# Altium PCB PoC.PcbDoc
Units mil, origin at the board's own origin, x right, y up, seen from the top; angles counter-clockwise.
Board outline 2125 x 3130 mil, 2 copper layers (Top Layer, Bottom Layer); 49 components, 65 nets, 196 pads, 61 vias.
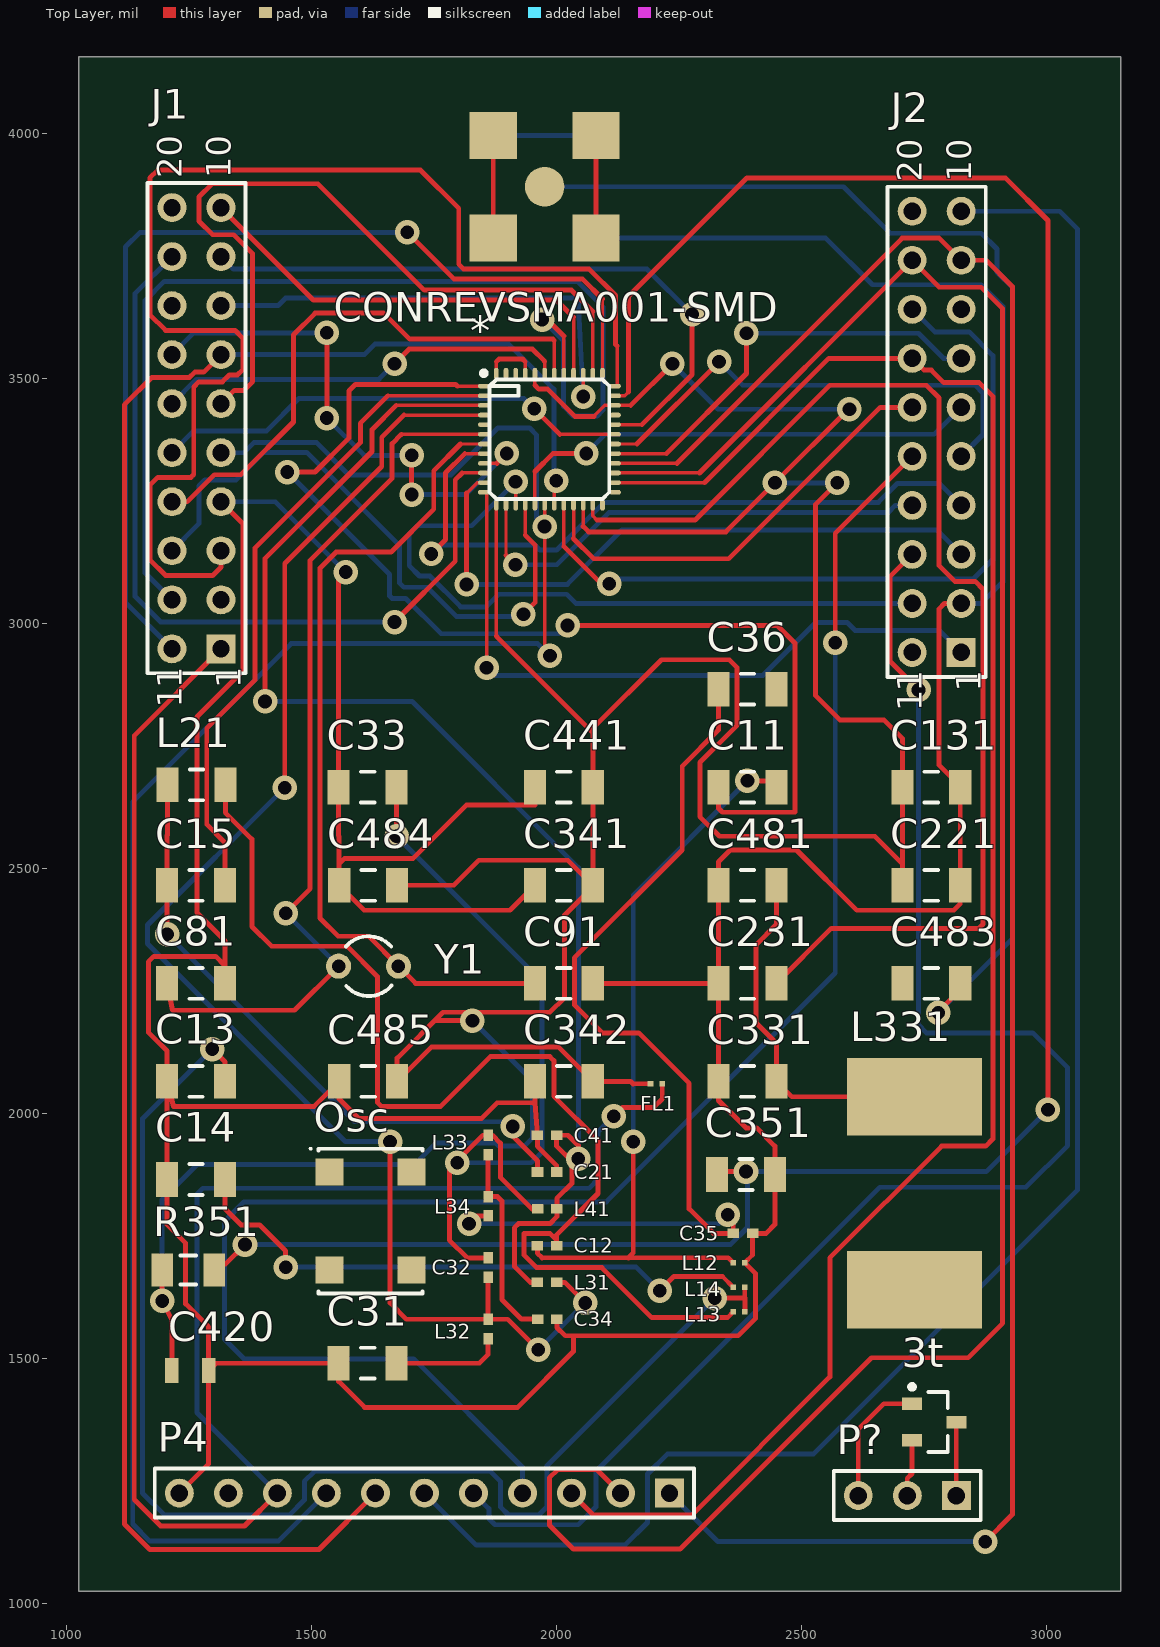
[diagram p0: Top Layer view]
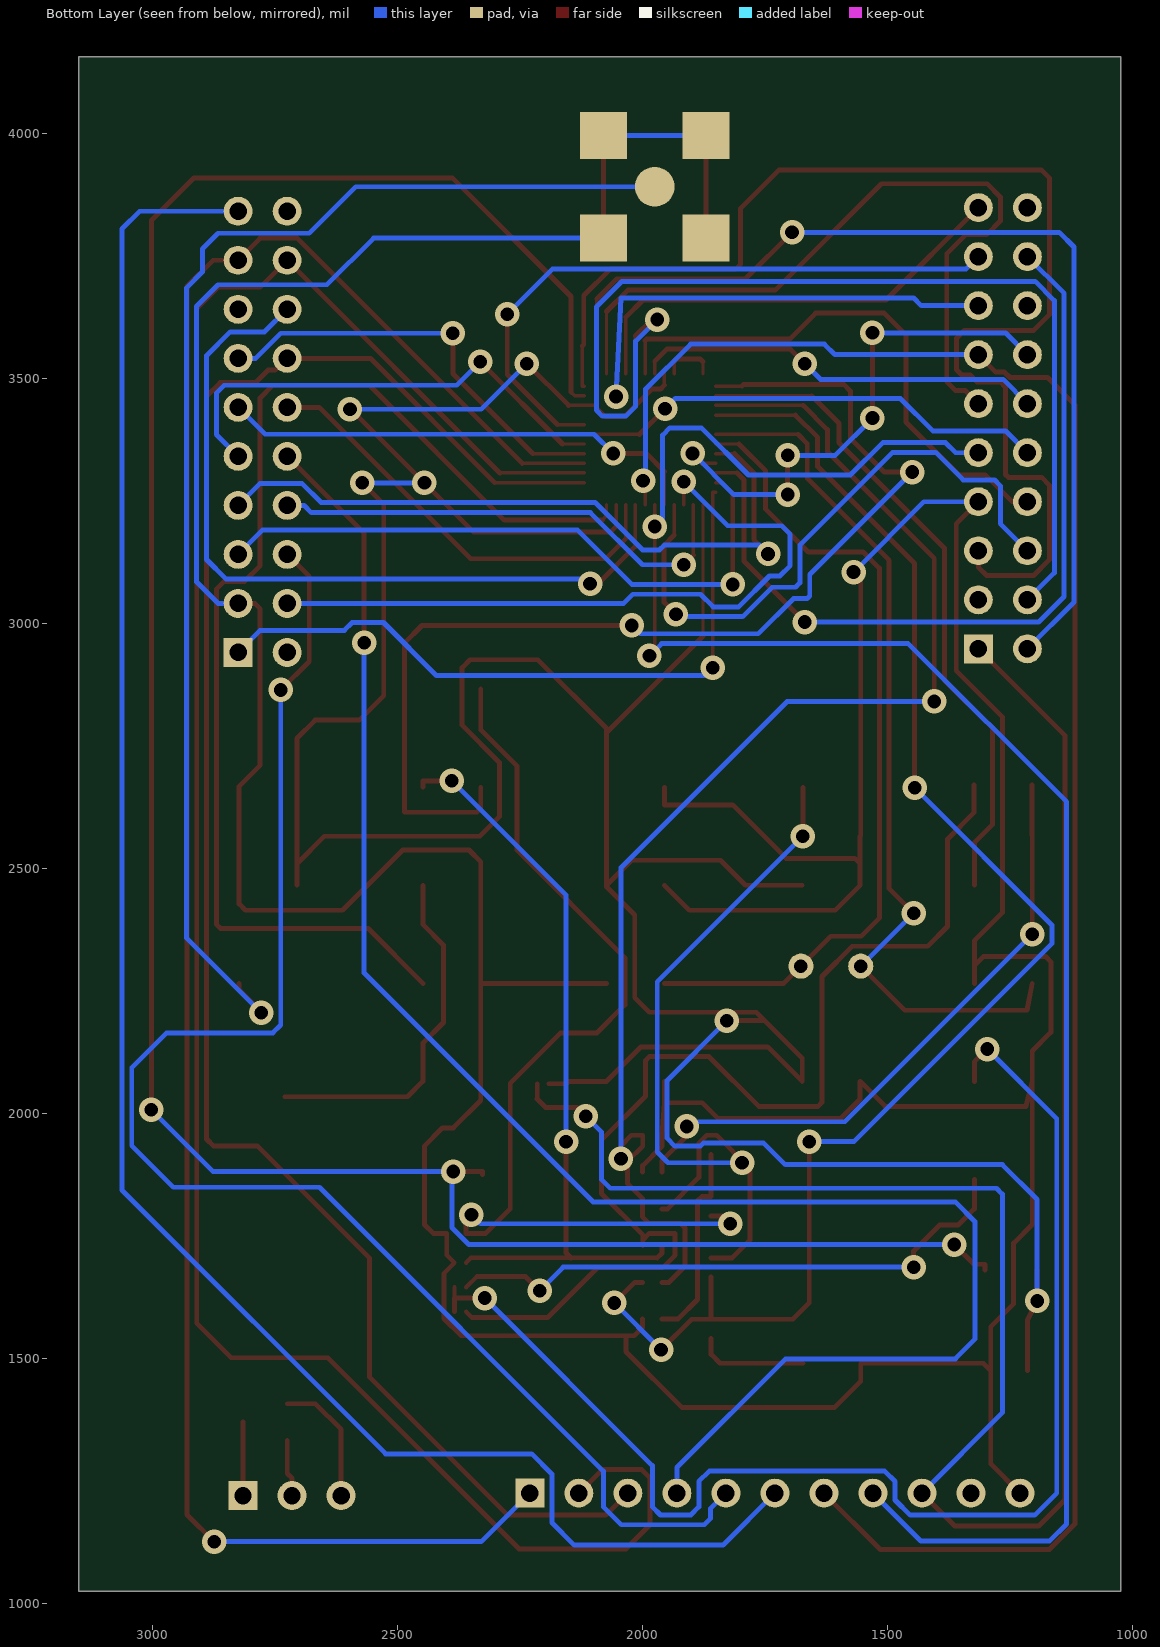
[diagram p1: Bottom Layer view, seen from below]

## Layer stack, top to bottom
Top Solder: solder mask 0.4, Solder Resist, Dk 3.5
Top Layer: signal copper 1.4
Dielectric 1: dielectric 12.6, FR-4, Dk 4.8
Bottom Layer: signal copper 1.4
Bottom Solder: solder mask 0.4, Solder Resist, Dk 3.5

## Board outline
1025,1026 1025,4156 3150,4156 3150,1026

## Design rules (kind name [scope] priority, off if disabled: settings)
Clearance [All] p1: gap=10 ignorepadtopadclearanceinfootprint=FALSE except(0: Arc-Hole Track-Hole SMDPad-Hole THPad-Hole Via-Hole Fill-Hole Poly-Hole Region-Hole Text-Hole)
PolygonConnect [All] p1: connectstyle=Relief reliefconductorwidth=10 reliefentries=4 polygonreliefangle="90 Angle" airgapwidth=10
RoutingVias [All] p1: holewidth=28 width=50 viastyle="Through Hole" minholewidth=28 minwidth=50 maxholewidth=28 maxwidth=50
SMDNeckDown [All] p1: percent=75.000
SolderMaskExpansion [All] p1: expansion=4
Width [All] p1: maxlimit=10 minlimit=5 preferedwidth=10 bottomlayer_minwidth=10 minimp=50.000000 maximp=50.000000 favimp=50.000000
30 further rules are at their usual default settings.

## Classes and differential pairs
component class Sheet2: J1 J2 P4

## Components (designator, comment, footprint, x,y, rotation, side; value= is the part's Value field where it differs from the comment)
3t "Temp" SOT95P237X112-3N 2770,1371 r0 top
* "CC1352R1F3RGZ_1" CC1352R 1985,3376 r0 top
C11 "Cap" CAPC3216X06N 2389.06,2666 r0 top value=12pF
C12 "Cap" 0402 1980,1731 r0 top value=1.1pF
C13 "Cap" CAPC3216X06N 1264.06,2066 r0 top value=1pF
C14 "Cap" CAPC3216X06N 1264.06,1866 r0 top value=1pF
C15 "Cap" CAPC3216X06N 1264.05,2466 r180 top value=12pF
C21 "Cap" 0402 1980.32,1881 r180 top value=1.1pF
C31 "Cap" CAPC3216X06N 1614.05,1491 r180 top value=100pF
C32 "Cap" 0402 1860,1686.31 r90 top value=3.6pF
C33 "Cap" CAPC3216X06N 1614.06,2666 r0 top value=2.7pF
C34 "Cap" 0402 1980.63,1581 r180 top value=6.2pF
C35 "Cap" 0402 2379.69,1756 r180 top value=3pF
C36 "Cap" CAPC3216X06N 2389.06,2866 r0 top value=100pF
C41 "Cap" 0402 1980,1956 r0 top value=3.6pF
C81 "Cap" CAPC3216X06N 1264.06,2266 r0 top value=12pF
C91 "Cap" CAPC3216X06N 2014.53,2266 r0 top value=12pF
C131 "Cap" CAPC3216X06N 2764.06,2666 r0 top value=0.1uF
C221 "Cap" CAPC3216X06N 2764.06,2466 r0 top value=0.1uF
C231 "Cap" CAPC3216X06N 2389.06,2266 r180 top value=1uF
C331 "Cap" CAPC3216X06N 2389.06,2066 r180 top value=22uF
C341 "Cap" CAPC3216X06N 2014.53,2466 r180 top value=22uF
C342 "Cap" CAPC3216X06N 2014.53,2066 r180 top value=0.1uF
C351 "Cap" CAPC3216X06N 2385.94,1876 r0 top value=0.1uF
C420 "Cap" 0805 1252.4,1476 r0 top value=0.01uF
C441 "Cap" CAPC3216X06N 2014.53,2666 r180 top value=0.1uF
C481 "Cap" CAPC3216X06N 2389.06,2466 r180 top value=0.1uF
C483 "Cap" CAPC3216X06N 2764.06,2266 r0 top value=12pF
C484 "Cap" CAPC3216X06N 1615.2,2466 r180 top value=12pF
C485 "Cap" CAPC3216X06N 1615.2,2066 r180 top value=12pF
CONREVSMA001-SMD "" SMA_Jack 1975.16,3891 r90 top
FL1 "BLM" 0201 2203.19,2061 r180 top value=2.4nH
J1 "SSQ-110-23-L-D" HDR2X10_CEN 1315,2948.4 r90 top
J2 "SSQ-110-23-L-D" HDR2X10_CEN 2825,2941 r90 top
L12 "Inductor" 0201 2371.81,1696 r0 top value=2.4nH
L13 "Inductor" 0201 2371.81,1596 r0 top value=1.5nH
L14 "Inductor" 0201 2371.81,1646 r180 top value=2nH
L21 "Inductor" CAPC3216X06N 1265,2671 r0 top value=2.4nH
L31 "Inductor" 0402 1980,1656 r180 top value=27nH
L32 "Inductor" 0402 1860,1561 r270 top value=7.5nH
L33 "Inductor" 0402 1860,1936.32 r270 top value=6.8nH
L34 "Inductor" 0402 1860,1811.32 r270 top value=6.8nH
L41 "Inductor" 0402 1980.63,1806 r180 top value=7.5nH
L331 "Inductor" "Non-Standard Inductor" 2730,1837.85 r90 top value=6.8mH
Osc "Osc" OSC 1620,1781 r0 top
P4 "BB02-HJ221-KB1-603000" HDR1X11 2230,1226 r180 top
P? "Header 3" HDR1X3 2815,1221 r180 top
R351 "Res3" C1206 1248.15,1681 r180 top value=100K
Y1 "32.768kHz" R38 1616.02,2301 r90 top

## Footprints (in the part's own frame and the unit in brackets; to place one, negate y for a bottom-side part, rotate by r counter-clockwise, add the part's x,y. Pads: shape width x height; smd on the part's side, far side on the other; paste and mask are expansions set on the pad)
0201 [mm]
  rect 0.3x0.3 smd: 1(-0.3,0) 2(0.3,0)
0402 [mm] "Chip Capacitor, Body 1.0x0.5mm, IPC High Density"
  rect 0.6x0.5 smd: 1(-0.5,0) 2(0.5,0)
  body extent -0.55,-0.3 0.55,0.3, height 1.3
0805 [mm]
  rect 0.7x1.3 smd: 1(-0.95,0) 2(0.95,0)
C1206 [mm] "Chip Capacitor, Body 3.2x1.6mm, IPC High Density"
  rect 1.1x1.7 smd: 1(-1.35,0) 2(1.35,0)
  silkscreen extent -0.4,-0.75 0.4,0.75, body extent -1.7,-0.9 1.7,0.9, height 1.3
CAPC3216X06N [mm] "Chip Capacitor, 2-Leads, Body 3,20x1,60mm, IPC Medium Density"
  rect 1.15x1.8 smd: 1(-1.5,0) 2(1.5,0)
  silkscreen extent -0.35,-0.8 0.35,0.8, body extent -1.7,-0.9 1.7,0.9, height 0.6
CC1352R [mm] "CQFP, 48-Leads, Body 7,40x7,40mm, Pitch 0,50mm, IPC Medium Density"
  oval 0.6x0.24 smd: 1(-3.4,2.75) 2(-3.4,2.25) 3(-3.4,1.75) 4(-3.4,1.25) 5(-3.4,0.75) 6(-3.4,0.25) 7(-3.4,-0.25) 8(-3.4,-0.75) 9(-3.4,-1.25) 10(-3.4,-1.75) 11(-3.4,-2.25) 12(-3.4,-2.75) 25(3.4,-2.75) 26(3.4,-2.25) 27(3.4,-1.75) 28(3.4,-1.25) 29(3.4,-0.75) 30(3.4,-0.25) 31(3.4,0.25) 32(3.4,0.75) 33(3.4,1.25) 34(3.4,1.75) 35(3.4,2.25) 36(3.4,2.75)
  oval 0.24x0.6 smd: 13(-2.75,-3.4) 14(-2.25,-3.4) 15(-1.75,-3.4) 16(-1.25,-3.4) 17(-0.75,-3.4) 18(-0.25,-3.4) 19(0.25,-3.4) 20(0.75,-3.4) 21(1.25,-3.4) 22(1.75,-3.4) 23(2.25,-3.4) 24(2.75,-3.4) 37(2.75,3.4) 38(2.25,3.4) 39(1.75,3.4) 40(1.25,3.4) 41(0.75,3.4) 42(0.25,3.4) 43(-0.25,3.4) 44(-0.75,3.4) 45(-1.25,3.4) 46(-1.75,3.4) 47(-2.25,3.4) 48(-2.75,3.4)
  silkscreen extent -3.52,-3.1 3.1,3.54, body extent -3.5,-3.5 6.98,3.5, height 1
HDR1X3 [mm] "Connector; Header; 3 Position"
  rect 1.5x1.5 hole 0.9: 1(0,0)
  round 1.5 hole 0.9: 2(2.54,0) 3(5.08,0)
  silkscreen extent -1.27,-1.27 6.35,1.27
HDR1X11 [mm] "Connector; Header; 11 Position"
  rect 1.5x1.5 hole 0.9: 1(0,0)
  round 1.5 hole 0.9: 2(2.54,0) 3(5.08,0) 4(7.62,0) 5(10.16,0) 6(12.7,0) 7(15.24,0) 8(17.78,0) 9(20.32,0) 10(22.86,0) 11(25.4,0)
  silkscreen extent -1.27,-1.27 26.67,1.27
HDR2X10_CEN [mm] "Connector; Header; 10x2 Position"
  rect 1.5x1.5 hole 0.9: 1(0,0)
  round 1.5 hole 0.9: 2(2.54,0) 3(5.08,0) 4(7.62,0) 5(10.16,0) 6(12.7,0) 7(15.24,0) 8(17.78,0) 9(20.32,0) 10(22.86,0) 11(0,2.54) 12(2.54,2.54) 13(5.08,2.54) 14(7.62,2.54) 15(10.16,2.54) 16(12.7,2.54) 17(15.24,2.54) 18(17.78,2.54) 19(20.32,2.54) 20(22.86,2.54)
  silkscreen extent -1.27,-1.27 24.13,3.81
"Non-Standard Inductor" [mm]
  rect 4x7 smd: 1(-5,0) 2(5,0)
OSC [mm] "SON, 4-Leads, Body 7,00x5,08mm, Pitch 5,08mm, IPC Medium Density"
  rect 1.45x1.4 smd: 1(-2.13,2.54) 2(-2.13,-2.54) 3(2.13,-2.54) 4(2.13,2.54)
  silkscreen extent -3.15,-3.75 2.7,3.8, body extent -2.55,-3.6 2.55,3.6, height 1.8
R38 [mm] "Crystal, Thru-Hole; 2 Leads; Body 3.1 x 8.2 mm (Dia.xH)"
  round 1.3 hole 0.7: 1(0,1.55) 2(0,-1.55)
  silkscreen extent -1.55,-1.19 1.55,1.17
SMA_Jack [mm]
  round 2.05 all layers, no hole: 1(0,0)
  rect 2.44x2.44 all layers, no hole: 2(-2.66,2.66) 3(-2.66,-2.66) 4(2.66,2.66) 5(2.66,-2.66)
SOT95P237X112-3N [mm] "SOT23, 3-Leads, Body 2,86x2,37mm, Pitch 0,95mm, IPC Medium Density"
  rect 1.05x0.65 smd: 1(-1.15,0.95) 2(-1.15,-0.95) 3(1.15,0)
  silkscreen extent -1.27,-1.55 0.7,1.95, body extent -0.7,-1.52 0.7,1.53, height 1.12

## Part data
C11 C12 C13 C14 C15 C21 C31 C32 C33 C34 C35 C36 C41 C81 C91 C131 C221 C231 C331 C341 C342 C351 C420 C441 C481 C483 C484 C485: "Capacitor", LatestRevisionDate=17-Jul-2002, LatestRevisionNote="Re-released for DXP Platform.", PackageDescription="Radial Cap, Thru-Hole; 2 Leads; 0.3 in Pin Spacing", PackageReference=RAD-0.3, Published=8-Jun-2000, Publisher="Altium Limited"
CONREVSMA001-SMD: library part COAX-M, "RF Coaxial PCB Connector, MMCX; Thru-Hole, Vertical Mount Plug,  50 Ohm Impedance", PackageDocument="Rev. A, 16-Jun-1997", ComponentLink1Description="Manufacturer Link", ComponentLink1URL=http://www.amphenolrf.com/, DatasheetDocument=30-May-2003, DrillSize="Corresponds to nominal value.", LatestRevisionDate=15-Jul-2004, LatestRevisionNote="Component Replaced.", PackageReference=908-21103, PCB_Layout="Complies with manufacturer's recommendation.", Published=15-Jul-2004, Publisher="Altium Limited"
FL1: library part Inductor, "Inductor", Code_IEC=1005, Code_JEITA=0402, LatestRevisionDate=29-May-2009, LatestRevisionNote="IPC-7351 Footprint Added.", PackageDescription="Chip Inductor", PackageReference=0402-A, Published=8-Jun-2000, Publisher="Altium Limited"
P4: library part "Header 11", "Header, 11-Pin", LatestRevisionDate=17-Jul-2002, LatestRevisionNote="Re-released for DXP Platform.", Publisher="Altium Limited"
P?: "Header, 3-Pin", LatestRevisionDate=17-Jul-2002, LatestRevisionNote="Re-released for DXP Platform.", Publisher="Altium Limited"
R351: "Resistor", LatestRevisionDate=29-May-2009, LatestRevisionNote="IPC-7351 Footprint Added.", PackageDescription="Chip Resistor", PackageReference=J1-0603, Published=8-Jun-2000, Publisher="Altium Limited"
Y1: library part XTAL, "Crystal Oscillator", LatestRevisionDate=17-Jul-2002, LatestRevisionNote="Re-released for DXP Platform.", PackageDescription="Crystal, Thru-Hole; 2 Leads; Body 3.1 x 8.2 mm (Dia.xH)", PackageReference=R38, Published=8-Jun-2000, Publisher="Altium Limited"
L12 L13 L14 L21 L31 L32 L33 L34 L41 L331: Code_IEC=1005, Code_JEITA=0402, LatestRevisionDate=29-May-2009, LatestRevisionNote="IPC-7351 Footprint Added.", PackageDescription="Chip Inductor", PackageReference=0402-A, Published=8-Jun-2000, Publisher="Altium Limited"

## Via types
v1: diameter 50, hole 28, Top Layer to Bottom Layer, 61 vias

## Nets (pads, with @x,y where several pads share a name; then routed paths per layer and width w, separated by ;. In a path a pad name is that pad's centre, name@x,y a point inside that pad or via, vN(x,y) a via of type N, cw(c..) or ccw(c..) an arc to the next point about the centre after c; other vN are vias at no path point)
BP_RESET: J2.11
DIO3: *.8 J2.4 | length 1439.1
  Top Layer w7.09: 1812.27,3346.47 *.8
  Top Layer w10: v1(1744,3142) 1772.97,3170.97 1772.97,3307.17 1812.27,3346.47
  Bottom Layer w10: v1(1744,3142) 1761.84,3159.84 1955.79,3159.84 1965.63,3150 2000,3150 2097,3247 2656,3247 2695,3286 2780,3286 J2.4
DIO4_SCL: *.9 J1.17 | length 1077
  Top Layer w7.09: *.9 1877.79,3326.79
  Top Layer w10: v1(1531,3419) v1(1531,3593) ; v1(1704,3263) v1(1704,3343) ; 1877.79,3326.79 v1(1898,3347)
  Bottom Layer w10: J1.17 1259.6,3593 v1(1531,3593) ; v1(1531,3419) 1607,3343 v1(1704,3343) ; v1(1704,3263) 1814,3263 v1(1898,3347)
DIO5_SDA: *.10 J1.19 | length 1680.4
  Top Layer w7.09: 1807,3307.1 *.10
  Top Layer w10: v1(1669,3003) 1792.97,3126.97 1792.97,3293.07 1807,3307.1
  Bottom Layer w10: J1.19 1140,3673.4 1140,3055 1192,3003 v1(1669,3003)
DIO6_RLED: *.11 J2.3 | length 1306.1
  Top Layer w7.09: 1816,3266 1837.42,3287.42 *.11
  Top Layer w10: v1(1816,3079.7) 1816,3266
  Bottom Layer w10: v1(1816,3079.7) 2021.7,3079.7 2133,3191 2775,3191 J2.3
DIO7_GLED: *.12 J2.1 | length 1408.2
  Top Layer w7.09: *.12 1856.77,3267.73 v1(1856.77,2910)
  Bottom Layer w10: v1(1856.77,2910) 1872.77,2894 2420.48,2894 2528.43,3001.95 2592.48,3001.95 2608.43,2986 2780,2986 J2.1
DIO8_MISO: *.14 J2.14 | length 989.7
  Top Layer w7.09: 1896.42,3139.21 *.14
  Top Layer w10: 1896.42,3139.21 v1(1915.79,3119.84)
  Bottom Layer w10: v1(1915.79,3119.84) 2000.08,3119.84 2106.33,3226.09 2675.79,3226.09 2690.69,3241 J2.14
DIO9_MOSI: *.15 J2.12 | length 1451.5
  Top Layer w7.09: *.15 v1@1916.1,3288.9
  Top Layer w10: v1(1916,3289) v1@1916.1,3288.9
  Bottom Layer w10: v1(1916,3289) 1826.4,3199.4 1716.4,3199.4 1699,3182 1699,3117.83 1720,3096.83 1741.17,3096.83 1804,3034 1856,3034 1881.7,3059.7 2020,3059.7 2038.7,3041 J2.12
DIO10_SCLK: *.16 J1.13 | length 1273
  Top Layer w7.09: 1935.79,3180.21 *.16
  Top Layer w10: v1(1932,3019) 1956,3043 1956,3160 1935.79,3180.21
  Bottom Layer w10: J1.13 1270,3203.4 1270,3281 1282,3293 1345.94,3293 1401.94,3349 1490,3349 1679,3160 1679,3082.92 1688,3073.92 1735.79,3073.92 1795.71,3014 1927,3014 v1(1932,3019)
DIO11_CS: *.17 J2.6 | length 991.6
  Top Layer w7.09: *.17 1955.47,3310
  Top Layer w10: 1955.47,3310 1992.47,3347 v1(2060,3347)
  Bottom Layer w10: v1(2060,3347) 2099,3386 2770,3386 J2.6
DIO12_RXD: *.18 J1.5 P4.8 | length 4149.9
  Top Layer w7.09: v1@1975.16,2944.84 v1(1975.16,3197.68) *.18
  Top Layer w10: v1@1975.16,2944.84 v1(1986,2934)
  Bottom Layer w10: J1.5 1361.34,3348.4 1381.94,3369 1510,3369 1576,3303 1784,3303 1880,3399 1944.28,3399 1959,3384.28 1959,3213.84 v1(1975.16,3197.68) ; P4.8 1432,1128 1170,1128 1135,1163 1135,2636 1458,2959 1961,2959 v1(1986,2934)
DIO13_TXD: *.19 J1.7 P4.7 | length 4069.3
  Top Layer w7.09: *.19 v1@1994.84,3287
  Top Layer w10: J1.7 1279.53,3512.93 1261.6,3512.93 1250.47,3501.8 1173.8,3501.8 1118,3446 1118,1163 1170,1111 1515,1111 P4.7 ; v1@1994.84,3287 v1(1999,3291.16)
  Bottom Layer w10: J1.7 1607.4,3548.4 1629,3570 1902,3570 1994,3478 1994,3296.16 v1(1999,3291.16)
DIO14_BTN2: *.20 J2.18 | length 1631.5
  Top Layer w7.09: 2014.54,3157.46 2014.54,3234.53 *.20
  Top Layer w10: 2014.54,3157.46 2091,3081 v1(2107,3081)
  Bottom Layer w10: v1(2107,3081) 2117,3091 2850,3091 2889.53,3130.53 2889.53,3546.47 2841.16,3594.84 2771.16,3594.84 J2.18
DIO15_BTN1: *.21 J2.16 | length 904.9
  Top Layer w7.09: 2034.21,3173 *.21
  Top Layer w10: 2034.21,3173 2075.21,3132 2350.84,3132 2659.84,3441 J2.16
DIO16_TDO: *.26 J2.17 P4.3 | length 3761.2
  Top Layer w7.09: *.26 2301.44,3287.42
  Top Layer w10: P4.3 2075,1181 2275,1181 2557.2,1463.2 2557.2,1706.2 2785,1934 2875,1934 2889.53,1948.53 2889.53,3463.47 2861.75,3491.25 2789.53,3491.25 2764.04,3516.74 2749.26,3516.74 J2.17 2555.02,3541 2301.44,3287.42
DIO17_TDI: *.27 J2.19 P4.2 | length 4484.7
  Top Layer w7.09: *.27 2291.1,3307.1
  Top Layer w10: P4.2 2082,1274 2002,1274 1985,1257 1985,1161 2034,1112 2251.74,1112 2642,1502.26 2839.26,1502.26 2909.53,1572.53 2909.53,3642.47 2866,3686 2780,3686 J2.19 2291.1,3307.1
DIO18_RTS/SWO: *.28 J2.9 P4.1 | length 4310.2
  Top Layer w7.09: *.28 2245.35,3326.79
  Top Layer w10: 2245.35,3326.79 2704.56,3786 2780,3786 J2.9 2876,3741 2929.53,3687.47 2929.53,1182.53 v1(2874,1127)
  Bottom Layer w10: P4.1 2329,1127 v1(2874,1127)
DIO19_CTS: *.29 J2.7 | length 877
  Top Layer w7.09: *.29 2223.48,3346.47
  Top Layer w10: 2223.48,3346.47 2387,3509.99 v1(2387,3592)
  Bottom Layer w10: v1(2387,3592) 2738,3592 2789,3541 J2.7
DIO20_Flash_CS: *.30 J2.5 | length 994.1
  Top Layer w7.09: *.30 2163.27,3366.16
  Top Layer w10: 2163.27,3366.16 v1(2331.11,3534)
  Bottom Layer w10: v1(2331.11,3534) 2379.11,3486 2853.53,3486 2869.53,3470 2869.53,3385.53 J2.5
DIO21: *.31 J1.15 | length 980
  Top Layer w7.09: 2006.16,3385.84 *.31
  Top Layer w10: v1(1954,3438) 2006.16,3385.84
  Bottom Layer w10: J1.15 1259.6,3393 1408,3393 1474,3459 1933,3459 v1(1954,3438)
DIO22: *.32 J1.9 | length 1332.2
  Top Layer w7.09: *.32 2173.53,3405.53
  Top Layer w10: 2173.53,3405.53 2276,3508 v1(2276,3631)
  Bottom Layer w10: J1.9 1340.4,3723 2184,3723 v1(2276,3631)
DIO23_Analog: *.36 J1.3 | length 2614.5
  Top Layer w7.09: *.36 2123,3484.27 2123,3566
  Top Layer w10: J1.3 1315,3115 1298,3098 1202,3098 1170,3130 1170,3282 1186,3298 1253.53,3298 1259.53,3304 1259.53,3482.46 1270,3492.93 1317.93,3492.93 1332,3507 1348.53,3507 1359.53,3518 1359.53,3582 1343.53,3598 1202,3598 1170,3630 1170,3909 1186,3925 1722,3925 1800,3847 1800,3733 1810,3723 2066,3723 2120,3669 2120,3569 2123,3566
DIO24_Analog: *.37 J1.11 | length 2053.1
  Top Layer w7.09: *.37 2093.27,3662
  Top Layer w10: v1(1695,3798) 1790,3703 2052.27,3703 2093.27,3662
  Bottom Layer w10: J1.11 1120,3043.4 1120,3768 1150,3798 v1(1695,3798)
DIO25_Analog: *.38 J1.6 | length 1579.7
  Top Layer w7.09: *.38 2073.58,3636.42
  Top Layer w10: J1.6 1342.3,3475.7 1362,3475.7 1379.53,3493.23 1379.53,3754.47 1341,3793 1298,3793 1270,3821 1270,3870 1297,3897 1512.69,3897 1729.69,3680 2030,3680 2073.58,3636.42
DIO26_Analog: *.39 J1.8 | length 983.2
  Top Layer w7.09: v1@2053.9,3464.97 *.39
  Top Layer w10: v1@2053.9,3464.97 v1(2054,3463)
  Bottom Layer w10: J1.8 1431.4,3648.4 1447,3664 2043.61,3664 v1(2054,3463)
DIO27_Analog: *.40 J1.10 | length 926.9
  Top Layer w7.09: *.40 2034.21,3625
  Top Layer w10: J1.10 1503.4,3660 1999.21,3660 2034.21,3625
DIO28_Analog: *.41 J1.12 | length 2239.4
  Top Layer w7.09: *.41 2014.53,3586.47
  Top Layer w10: v1(1970,3620) 1981,3620 2014.53,3586.47
  Bottom Layer w10: J1.12 1160,3103.4 1160,3658.68 1199.32,3698 2042,3698 2094,3646 2094,3435 2082,3423 2034,3423 2014,3443 2014,3576 v1(1970,3620)
DIO29_Analog: *.42 J1.14 | length 1133.9
  Top Layer w7.09: *.42 1994.84,3577.16
  Top Layer w10: J1.14 1246.24,3248.4 1301.24,3303.4 1355.45,3303.4 1463,3410.95 1463,3589 1507,3633 1647,3633 1700,3580 1992,3580 1994.84,3577.16
DIO30_Analog: *.43 J1.16 | length 841.5
  Top Layer w7.09: *.43 1975.16,3534.84
  Top Layer w10: v1(1669,3530) 1698.61,3559.61 1950.39,3559.61 1975.16,3534.84
  Bottom Layer w10: J1.16 1264.6,3498 1637,3498 v1(1669,3530)
GND: C13.1 C14.1 C21.1 C31.2 C33.1 C34.1 C35.1 C41.1 C81.2 C91.2 C131.2 C221.2 C231.2 C331.2 C341.2 C342.2 C351.2 C420.2 C441.2 C481.2 C484.2 C485.2 CONREVSMA001-SMD.2 CONREVSMA001-SMD.3 CONREVSMA001-SMD.4 CONREVSMA001-SMD.5 J1.4 J2.2 L12.2 P4.11 | length 11397.4
  Top Layer w8.86: 2399.37,1711.75 L12.2 2405,1674.62
  Top Layer w10: P4.11 1289.8,1285.8 C420.2 ; J1.4 1360,3203.4 1360,2903.87 1266,2809.87 1266,2410 1323.11,2352.89 1323.11,2302 ; C81.2 1323.11,2302 ; v1(1569.5,3104.9) 1555,3090.4 C33.1 1555,2567.14 1556.14,2566 1556.14,2510 ; CONREVSMA001-SMD.2 CONREVSMA001-SMD.4 ; C342.2 1955.47,2022.29 ; C341.2 1904.47,2415 1607.14,2415 C484.2 1556.14,2510 ; C441.2 1955.47,2630 1816,2630 1707,2521 1567.14,2521 1556.14,2510 ; C21.1 2000,1894 1960.32,1933.68 C41.1 1955.47,2022.29 ; C34.1 2000.32,1564 2017.32,1547 2034,1547 ; C91.2 C231.2 ; CONREVSMA001-SMD.3 CONREVSMA001-SMD.5 ; 2399.37,1711.75 C35.1 2427,1756 2445,1774 C351.2 2445,1934 2408,1971 2386,1971 2330,2027 C331.2 C231.2 ; 2405,1674.62 2405,1582 2370,1547 2034,1547 ; J2.2 2791,3041 2780,3030 2780,2710.89 2823.11,2667.78 C131.2 C221.2 2823.11,2428.11 2810,2415 2612,2415 2489,2538 2354,2538 2330,2514 C481.2 C231.2 ; C13.1 1218,2015 1505.14,2015 C485.2 1556.14,2030 1595.58,1990.56 1846.56,1990.56 1878.29,2022.29 1955.47,2022.29 ; C13.1 1205,2128 1167,2166 1167,2310 1178,2321 1304.11,2321 1323.11,2302 ; C13.1 C14.1 1205,1774 1243,1736 1243,1612 1289.8,1565.2 C420.2 ; C420.2 1304.8,1491 C31.2 1555,1454 1608,1401 1920,1401 2034,1515 2034,1547
  Bottom Layer w10: J1.4 1426,3248.4 v1(1569.5,3104.9) ; CONREVSMA001-SMD.4 CONREVSMA001-SMD.5 ; CONREVSMA001-SMD.3 2548.72,3786.28 2644,3691 2866,3691 2910,3647 2910,3085 2866,3041 J2.2
LP_RESET: J2.10 P4.6 | length 3946.7
  Bottom Layer w10: P4.6 1836,1120 2139,1120 2185,1166 2185,1265 2226,1306 2524,1306 3062,1844 3062,3805 3026,3841 J2.10
Net3t_1T: P?.1
Net3t_2T: P?.2
Net3t_3T: P?.3
Net*_1: *.1 C11.1 | length 2300.6
  Top Layer w7.09: 1797.38,3484.27 *.1
  Top Layer w10: v1(1450,3309) 1506.86,3309 1576,3378.14 1576,3474.27 1589.45,3487.72 1793.93,3487.72 1797.38,3484.27 ; v1(2022,2996) 2450,2996 2486,2960 2486,2615 2338,2615 2330,2623 C11.1
  Bottom Layer w10: v1(1450,3309) 1659,3100 1659,3056.09 1664,3051.09 1691.91,3051.09 1764,2979 2005,2979 v1(2022,2996)
Net*_2: *.2 C15.1 | length 1362.7
  Top Layer w7.09: 1655.37,3464.58 *.2
  Top Layer w10: C15.1 1323.11,2553 1286,2590.11 1286,2786.23 1384,2884.23 1384,3153.7 1599.33,3369.03 1599.33,3408.54 1655.37,3464.58
Net*_3: *.3 C41.2 L31.2 L41.1 | length 2773.8
  Top Layer w7.09: 1672.46,3444.9 *.3
  Top Layer w10: v1(1405,2841) 1405,3132.9 1623,3350.9 1623,3395.44 1672.46,3444.9 ; L31.2 1946,1656 1913.5,1688.5 1913.5,1767.35 1922,1775.84 1986.16,1775.84 2000.32,1790 L41.1 2000.32,1827.32 2031,1858 2031,1902.69 1999.69,1934 C41.2 2023,1956 2044,1935 v1(2044,1908)
  Bottom Layer w10: v1(1405,2841) 1705,2841 2044,2502 v1(2044,1908)
Net*_4: *.4 C32.1 L31.1 L32.1 | length 3088.1
  Top Layer w7.09: 1688.21,3425.21 *.4
  Top Layer w10: v1(1445,2665) 1445,3122.3 1643,3320.3 1643,3380 1688.21,3425.21 ; v1(1660,1943) 1660,1614 1693.32,1580.68 L32.1 ; C32.1 L32.1 ; v1(1962.34,1518.34) 1900,1580.68 L32.1 ; L31.1 2016,1656 v1(2058,1614)
  Bottom Layer w10: v1(1445,2665) 1165,2385 1165,2347 1569,1943 v1(1660,1943) ; v1(1962.34,1518.34) v1(2058,1614)
Net*_6: *.6 C81.1 Y1.1 | length 1827.8
  Top Layer w7.09: 1683,3385.84 *.6
  Top Layer w10: C81.1 1216,2211 1465,2211 Y1.1 ; v1(1447,2409) 1497,2459 1497,3129 1664,3296 1664,3366.84 1683,3385.84
  Bottom Layer w10: v1(1447,2409) Y1.1
Net*_7: *.7 C91.1 Y1.2 | length 1692.5
  Top Layer w7.09: 1803.67,3366.16 *.7
  Top Layer w10: 1803.67,3366.16 1749,3311.49 1749,3233 1661.96,3145.96 1550,3145.96 1517,3112.96 1517,2399 1554,2362 1616.05,2362 Y1.2 1712.05,2266 C91.1
Net*_13: *.13 *.22 *.34 *.44 C131.1 C221.1 C341.1 C342.1 C420.1 C441.1 C484.1 C485.1 FL1.2 R351.2 | length 7992.5
  Top Layer w7.09: 1876.73,2974.27 *.13 ; 1955.47,3486 *.44 ; 2053.9,3198 *.22 ; 2075.65,3422.54 2098,3444.9 *.34 2150.9,3444.9
  Top Layer w8.86: 2155.47,2061 FL1.2
  Top Layer w10: R351.2 v1(1195,1618) 1215,1579 C420.1 ; C484.1 1790,2466 1841,2517 2022.58,2517 C341.1 ; v1(1828,2189.75) 1751,2189.75 1674.25,2113 ; 1876.73,2974.27 2073.58,2777.42 ; 1955.47,3486 1963.47,3478 1981.25,3478 2036.7,3422.54 2075.65,3422.54 ; 2053.9,3198 2064.9,3187 2345,3187 v1(2445,3287) 2595,3437 v1(2597,3437) ; 2150.9,3444.9 v1(2236,3530) ; 2155.47,2061 2150.47,2066 C342.1 2003.15,2136.44 1744.69,2136.44 C485.1 1674.25,2113 ; v1(2572,3287) 2528,3243 2528,2853 2578,2803 2668,2803 2705,2766 C131.1 2705,2510 ; C221.1 2705,2510 ; 1674.25,2113 1674.25,2113.25 1767.94,2206.94 1986,2206.94 2015.94,2236.88 2015.94,2405.36 2073.58,2463 C341.1 ; C341.1 C441.1 2073.58,2777.42 ; 2073.58,2777.42 2073.58,2786 2213.58,2926 2352,2926 2368,2910 2368,2792.44 2292,2716.44 2292,2606 2332,2566 2649,2566 2705,2510
  Bottom Layer w10: v1(1195,1618) 1195,1825 1266,1896 1709,1896 1753,1940 1876,1940 1882,1934 1934,1934 1950,1950 1950,2067.75 v1(1828,2189.75) ; v1(2236,3530) 2329,3437 v1(2597,3437) ; v1(2445,3287) v1(2572,3287)
Net*_23: *.23 C231.1 | length 2463.5
  Top Layer w7.09: *.23 2073.58,3219.42 2082,3211
  Top Layer w10: 2082,3211 2282,3211 2557,3486 2754,3486 2780,3460 2780,3118 2812,3086 2853.53,3086 2869.53,3070 2869.53,2386.53 2861,2378 2560.11,2378 C231.1
Net*_45: *.45 *.48 | length 112
  Top Layer w7.09: *.48 1876.73,3534 ; *.45 1935.79,3534
  Top Layer w10: 1876.73,3534 1882.34,3539.61 1930.18,3539.61 1935.79,3534
Net*_46: *.46
Net*_47: *.47
NetC11_2: C11.2 C12.1 L12.1 | length 1568.9
  Top Layer w8.86: 1970,1706 2146,1706 2350,1706 L12.1
  Top Layer w10: C12.1 1960.32,1715.68 1970,1706 ; 2146,1706 2156,1716 v1(2156,1943) ; v1(2389,2679) 2448.11,2679 C11.2
  Bottom Layer w10: v1(2156,1943) 2156,2446 v1(2389,2679)
NetC12_2: C12.2 L13.1 L21.2 | length 2325.4
  Top Layer w8.86: 2348,1584 L13.1
  Top Layer w10: L21.2 1324.05,2613.95 1378,2560 1378,2382 1418.41,2341.59 1572.41,2341.59 1634,2280 1634,2023 1642,2015 1763,2015 1864.44,2116.44 1986,2116.44 1994,2108.44 1994,2036 2084,1946 2084,1837.31 1999.69,1753 1999.69,1742.16 ; C12.2 1999.69,1742.16 ; 2348,1584 2194,1584 2092,1686 1959,1686 1933.5,1711.5 1933.5,1755.84 1986,1755.84 1999.69,1742.16
NetC13_2: C13.2 L13.2 L14.1 | length 2698.5
  Top Layer w8.86: 2383.62,1624 L14.1
  Top Layer w10: v1(1297,2132) 1323.11,2105.89 C13.2 ; v1(2322,1624) 2383.62,1624 L13.2
  Bottom Layer w10: v1(1297,2132) 1155,1990 1155,1226 1200,1181 1454,1181 1485,1212 1485,1250 1506,1271 1864,1271 1885,1250 1885,1198 1901.53,1181.47 1963.47,1181.47 1980,1198 1980,1282 v1(2322,1624)
NetC14_2: C14.2 L14.2 | length 1206.5
  Top Layer w8.86: 2338,1668 L14.2
  Top Layer w10: C14.2 1323.11,1806 1356.11,1773 1394,1773 1447,1720 v1(1447,1687) ; v1(2210,1639) 2239,1668 2338,1668
  Bottom Layer w10: v1(1447,1687) 2162,1687 v1(2210,1639)
NetC15_2: C15.2 C21.2 L21.1 | length 1286.7
  Top Layer w10: v1(1205,2366) C15.2 1205,2568 1205.94,2568.94 L21.1 ; v1(1910,1974) 1910,1954.63 1960.63,1904 C21.2
  Bottom Layer w10: v1(1205,2366) 1587.44,1983.56 1900.44,1983.56 v1(1910,1974)
NetC31_1: C31.1 L32.2 | length 226.7
  Top Layer w10: C31.1 1842,1491 1860,1509 L32.2
NetC32_2: C32.2 C33.2 L33.1 L41.2 | length 1621.7
  Top Layer w10: v1(1673.11,2566) C33.2 ; v1(1797,1900) v1@1783,1886 ; C32.2 1817,1706 1781,1742 1781,1884 v1@1783,1886 ; L41.2 1949,1806 1885,1870 1885,1940 1869,1956 L33.1 1849,1956 1781,1888 v1@1783,1886
  Bottom Layer w10: v1(1673.11,2566) 1970,2269.11 1970,1922 1948,1900 v1(1797,1900)
NetC34_2: C34.2 L33.2 L34.1 | length 407.9
  Top Layer w10: L33.2 L34.1 1879,1831 1888,1822 1888,1621 1928,1581 C34.2
NetC35_2: C35.2 C36.1 L34.2 | length 2056.6
  Top Layer w10: v1(1821,1775.63) 1837,1791.63 L34.2 ; C36.1 2330,2783 2256,2709 2256,2538.06 2035.94,2318 2035.94,2222 2092.94,2165 2167,2165 2270,2062 2270,1806 2320,1756 C35.2 2360,1783 v1(2349,1794)
  Bottom Layer w10: v1(1821,1775.63) 2330.63,1775.63 v1(2349,1794)
NetC36_2: C36.2
NetC331_1: C331.1 C481.1 L331.2 | length 729.7
  Top Layer w10: C481.1 2448.11,2386.11 2406,2344 2406,2186.11 2448.11,2144 C331.1 2479.41,2034.7 L331.2
NetC483_1: C483.1
NetC483_2: C483.2 CONREVSMA001-SMD.1 | length 2688.3
  Top Layer w10: v1(2778,2206) 2778,2207.89 2823.11,2253 C483.2
  Bottom Layer w10: CONREVSMA001-SMD.1 2585,3891 2680,3796 2866,3796 2898,3764 2898,3717 2930,3685 2930,2358 v1(2778,2206)
NetFL1_1: FL1.1 J1.1 P4.9 | length 3945.9
  Top Layer w8.86: 2215,2030 FL1.1
  Top Layer w10: J1.1 1138,2771.4 1138,1213 1192,1159 1363,1159 P4.9 ; v1(2116,1995) 2134,2013 2198,2013 2215,2030
  Bottom Layer w10: P4.9 1266,1390 1266,1836 1278,1848 2066,1848 2084,1866 2084,1963 v1(2116,1995)
NetJ1_2: J1.2
NetP4_10: P4.10
RF_SWITCH: 
WMCU_RESET: *.35 C351.1 R351.1 | length 5010.8
  Top Layer w7.09: *.35 2138.58,3464.58 2146,3472
  Top Layer w10: R351.1 1301.3,1693 1324,1693 v1(1364,1733) ; 2146,3472 2146,3667 2388,3909 2915,3909 3002,3822 v1(3002,2008) ; C351.1 2326.89,1882 v1(2386,1882)
  Bottom Layer w10: v1(1364,1733) 2354,1733 2389,1768 2389,1879 v1(2386,1882) 2876,1882 v1(3002,2008)
WMCU_TCK: J2.15 P4.4 | length 3583.6
  Top Layer w10: v1(2568,2961) 2568,3184 J2.15
  Bottom Layer w10: P4.4 1930,1278.19 1708.19,1500 1362,1500 1322.11,1539.89 1322.11,1780.21 1362,1820.11 2101.11,1820.11 2568,2287 v1(2568,2961)
WMCU_TMS: J2.13 P4.5 | length 3115.6
  Top Layer w10: J2.13 2680,3096 2680,2922.47 v1(2738,2864.47)
  Bottom Layer w10: P4.5 1861.56,1194.44 1861.56,1173.92 1874,1161.47 2043.47,1161.47 2080,1198 2080,1271 2659,1850 2957,1850 3042,1935 3042,2094 2971,2165 2754,2165 2738,2181 v1(2738,2864.47)
pads on no net: 3t.1 3t.2 3t.3 *.5 *.24 *.25 *.33 J1.18 J1.20 J2.8 J2.20 L331.1 Osc.1 Osc.2 Osc.3 Osc.4
copper on no net: | length 532.8
  Top Layer w10: 2615,1221 2615,1356 2667.4,1408.4 2724.72,1408.4 ; 2715,1221 2715,1256.28 2724.72,1266 2724.72,1333.6 ; 2815,1221 2815,1370.72

## Text inside footprints (layer, text, board x,y; h text height)
J1: Top Overlay "20" at 1235,3908.4 h50 r90; Top Overlay "10" at 1335,3908.4 h50 r90; Top Overlay "1" at 1235,2868.4 h50 r90; Top Overlay "1" at 1235,2828.4 h50 r90; Top Overlay "1" at 1355,2868.4 h50 r90
J2: Top Overlay "20" at 2745,3901 h50 r90; Top Overlay "10" at 2845,3901 h50 r90; Top Overlay "1" at 2745,2861 h50 r90; Top Overlay "1" at 2745,2821 h50 r90; Top Overlay "1" at 2865,2861 h50 r90